# EAGLE board ebox (EAGLE 6.3)

Size 100 x 80 mm. Coordinates in mm from the lower left corner, seen from the top.
Outline: 0,0 100,0 100,80 0,80 0,0
Copper layers (1*16): Top 0.035mm / dielectric 1.5mm / Bottom 0.035mm
Design rules "default": minimum track width 10mil, minimum drill 24mil, track to track 8mil, track to pad 8mil, pad to pad 8mil, via to via 8mil, smd to smd 8mil, copper to edge 40mil, drill to drill 8mil, minimum pad ring 10mil, minimum via ring 8mil, stop-mask expansion 4mil, vias tented up to drill 0mil, thermal gap 10mil

## Footprints (pad centres in the part's own frame; a part is rotated, then mirrored left to right if it is on the bottom)
C0805 = smd 1.3 x 1.5: 1 -0.95,0; 2 0.95,0
PANASONIC_D = smd 3 x 1.4: + 2.4,0; - -2.4,0
SOT23 = smd 1 x 1.4: 1 -0.95,-1.1; 2 0.95,-1.1; 3 0,1.1
SOT-23 = smd 0.787 x 0.889: 1 0.025,-1.016; 2 -0.94,1.016; 3 0.991,1.016
SMA = smd 2 x 2: A 2,0; C -2,0
TSSOP16 = smd 0.305 x 0.991: 1 -2.275,-2.918; 2 -1.625,-2.918; 3 -0.975,-2.918; 4 -0.325,-2.918; 5 0.325,-2.918; 6 0.975,-2.918; 7 1.625,-2.918; 8 2.275,-2.918; 9 2.275,2.918; 10 1.625,2.918; 11 0.975,2.918; 12 0.325,2.918; 13 -0.325,2.918; 14 -0.975,2.918; 15 -1.625,2.918; 16 -2.275,2.918
MSOP12-MSE = smd 0.45 x 1: 1 -1.625,-2.05; 2 -0.975,-2.05; 3 -0.325,-2.05; 4 0.325,-2.05; 5 0.975,-2.05; 6 1.625,-2.05; 7 1.625,2.05; 8 0.975,2.05; 9 0.325,2.05; 10 -0.325,2.05; 11 -0.975,2.05; 12 -1.625,2.05 | smd 2.845 x 1.651: 13 0,0
TQFP100 = smd 1.5 x 0.35: 1 -8,6; 2 -8,5.5; 3 -8,5; 4 -8,4.5; 5 -8,4; 6 -8,3.5; 7 -8,3; 8 -8,2.5; 9 -8,2; 10 -8,1.5; 11 -8,1; 12 -8,0.5; 13 -8,0; 14 -8,-0.5; 15 -8,-1; 16 -8,-1.5; 17 -8,-2; 18 -8,-2.5; 19 -8,-3; 20 -8,-3.5; 21 -8,-4; 22 -8,-4.5; 23 -8,-5; 24 -8,-5.5; 25 -8,-6; 51 8,-6; 52 8,-5.5; 53 8,-5; 54 8,-4.5; 55 8,-4; 56 8,-3.5; 57 8,-3; 58 8,-2.5; 59 8,-2; 60 8,-1.5; 61 8,-1; 62 8,-0.5; 63 8,0; 64 8,0.5; 65 8,1; 66 8,1.5; 67 8,2; 68 8,2.5; 69 8,3; 70 8,3.5; 71 8,4; 72 8,4.5; 73 8,5; 74 8,5.5; 75 8,6 | smd 0.35 x 1.5: 26 -6,-8; 27 -5.5,-8; 28 -5,-8; 29 -4.5,-8; 30 -4,-8; 31 -3.5,-8; 32 -3,-8; 33 -2.5,-8; 34 -2,-8; 35 -1.5,-8; 36 -1,-8; 37 -0.5,-8; 38 0,-8; 39 0.5,-8; 40 1,-8; 41 1.5,-8; 42 2,-8; 43 2.5,-8; 44 3,-8; 45 3.5,-8; 46 4,-8; 47 4.5,-8; 48 5,-8; 49 5.5,-8; 50 6,-8; 76 6,8; 77 5.5,8; 78 5,8; 79 4.5,8; 80 4,8; 81 3.5,8; 82 3,8; 83 2.5,8; 84 2,8; 85 1.5,8; 86 1,8; 87 0.5,8; 88 0,8; 89 -0.5,8; 90 -1,8; 91 -1.5,8; 92 -2,8; 93 -2.5,8; 94 -3,8; 95 -3.5,8; 96 -4,8; 97 -4.5,8; 98 -5,8; 99 -5.5,8; 100 -6,8
SOIC20R = smd 0.6 x 2.2: 1 -5.715,-4.775; 2 -4.445,-4.775; 3 -3.175,-4.775; 4 -1.905,-4.775; 5 -0.635,-4.775; 6 0.635,-4.775; 7 1.905,-4.775; 8 3.175,-4.775; 9 4.445,-4.8; 10 5.715,-4.8; 11 5.715,4.8; 12 4.445,4.8; 13 3.175,4.8; 14 1.905,4.8; 15 0.635,4.8; 16 -0.635,4.8; 17 -1.905,4.8; 18 -3.175,4.8; 19 -4.445,4.8; 20 -5.715,4.8
SOT23-DBV = smd 0.55 x 1.2: 1 -0.95,-1.3; 2 0,-1.3; 3 0.95,-1.3; 4 0.95,1.3; 5 -0.95,1.3
MSOP8 = smd 0.45 x 1: 1 -0.975,-2.05; 2 -0.325,-2.05; 3 0.325,-2.05; 4 0.975,-2.05; 5 0.975,2.05; 6 0.325,2.05; 7 -0.325,2.05; 8 -0.975,2.05
SO14 = smd 0.66 x 2.032: 1 -3.81,-3.073; 2 -2.54,-3.073; 3 -1.27,-3.073; 4 0,-3.073; 5 1.27,-3.073; 6 2.54,-3.073; 7 3.81,-3.073; 8 3.81,3.073; 9 2.54,3.073; 10 1.27,3.073; 11 0,3.073; 12 -1.27,3.073; 13 -2.54,3.073; 14 -3.81,3.073
SO08 = smd 0.66 x 2.032: 1 -1.905,-3.073; 2 -0.635,-3.073; 3 0.635,-3.073; 4 1.905,-3.073; 5 1.905,3.073; 6 0.635,3.073; 7 -0.635,3.073; 8 -1.905,3.073
AVR-ISP-6 = drill 1.016 square: 1 -2.54,-1.27 | drill 1.016 octagon: 2 -2.54,1.27; 3 0,-1.27; 4 0,1.27; 5 2.54,-1.27; 6 2.54,1.27
IHLP-2020CZ-11 = smd 1.918 x 2.794: 1 -2.038,0; 2 2.038,0
L2012C = smd 1 x 1: 1 -1,0; 2 1,0
0402 = smd 0.7 x 0.9: 1 -0.65,0; 2 0.65,0
SRR1280 = smd 2.896 x 5.41: 1 -4.851,0; 2 4.851,0
CHIPLED_1206 = smd 1.5 x 1.5: A 0,-1.75; C 0,1.75
P-LCC-4 = smd 3.3 x 4.8: A -2,3.15; C@1 -2,-3.15; C@3 2,3.15; C@4 2,-3.15
R1206 = smd 1.6 x 1.803: 1 -1.422,0; 2 1.422,0
TO252 = smd 1 x 1.6: 1 -2.28,-4.8; 2 2.28,-4.8 | smd 5.4 x 6.2: 3 0,2.5
R0805 = smd 1.3 x 1.5: 1 -0.95,0; 2 0.95,0
R6332 = smd 1 x 3.2: 1 -3.1,0; 2 3.1,0
CT10-G1 = smd 2 x 1.3: 1 -7.62,0; 2 7.62,0
SOT223 = smd 1.219 x 2.235: 1 -2.311,-3.099; 2 0,-3.099; 3 2.311,-3.099 | smd 3.6 x 2.2: 4 0,3.099
RN41 = smd 0.8 x 1.6: 1 -6.6,-6.6; 2 -5.4,-6.6; 3 -4.2,-6.6; 4 -3,-6.6; 5 -1.8,-6.6; 6 -0.6,-6.6; 7 0.6,-6.6; 8 1.8,-6.6; 9 3,-6.6; 10 4.2,-6.6; 11 5.4,-6.6; 12 6.6,-6.6; 13 6.6,6.6; 14 5.4,6.6; 15 4.2,6.6; 16 3,6.6; 17 1.8,6.6; 18 0.6,6.6; 19 -0.6,6.6; 20 -1.8,6.6; 21 -3,6.6; 22 -4.2,6.6; 23 -5.4,6.6; 24 -6.6,6.6 | smd 1.6 x 0.8: 25 -9.4,4.8; 26 -9.4,3.2; 27 -9.4,1.6; 28 9.4,3.1; 29 9.4,-3.1; 30 9.4,-4.122; 31 9.4,-1.9; 32 9.4,-0.7; 33 9.4,0.7; 34 9.4,1.9; 35 9.4,4.122
EM406 = smd 0.6 x 1.55: 1 0,0; 2 1,0; 3 2,0; 4 3,0; 5 4,0; 6 5,0 | smd 1.2 x 1.8: P$1 -1.3,-2.225; P$2 6.3,-2.225
BULLET = drill 4.25 pad 6: P$1 0,0
17984-7PG-300 = drill 1.016: 1 -1.054,1.826; 2 -2.108,0; 3 -1.054,-1.826; 4 1.054,-1.826; 5 2.108,0; 6 1.054,1.826; 7 0,0
22-23-2031 = drill 1 long: 1 -2.54,0; 2 0,0; 3 2.54,0
DEANS = drill 4.445 pad 4.826 long: NEG 0.762,2.54; POS 0,-2.54
7381-2PG-300 = drill 1.321 pad 2.54: 1 2.6,0; 2 -2.6,0
B4B-ZR = drill 0.7 pad 1.1: 1 -2.25,0; 2 -0.75,0; 3 0.75,0; 4 2.25,0
22-23-2021 = drill 1 long: 1 -1.27,0; 2 1.27,0
7381-3PG-300 = drill 1.321 pad 2.54: 1 2,1.2; 2 -2,1.2; 3 0,-2.4

## Placement (x,y rotation side)
C2  0.1uF  [C0805]  -30.48,99.06 0 top  (outside the outline)
C3  0.1uF  [C0805]  -36.83,99.06 0 top  (outside the outline)
C4  0.1uF  [C0805]  -43.18,99.06 0 top  (outside the outline)
C5  0.1uF  [C0805]  -49.53,99.06 0 top  (outside the outline)
C6  0.1uF  [C0805]  -55.88,99.06 0 top  (outside the outline)
C7  1uF  [C0805]  27.94,58.42 90 top
C8  68uF  [PANASONIC_D]  27.94,31.75 270 top
C9  10uF  [C0805]  -35.56,111.76 0 top  (outside the outline)
C10  10uF  [C0805]  -41.91,111.76 0 top  (outside the outline)
C11  0.1uF  [C0805]  -62.23,99.06 0 top  (outside the outline)
C12  0.1uF  [C0805]  -68.58,99.06 0 top  (outside the outline)
C13  0.1uF  [C0805]  -74.93,99.06 0 top  (outside the outline)
C14  0.1uF  [C0805]  -81.28,99.06 0 top  (outside the outline)
C15  68uF  [PANASONIC_D]  29.21,22.86 0 top
C16  0.1uF  [C0805]  -87.63,99.06 0 top  (outside the outline)
C17  0.1uF  [C0805]  -93.98,99.06 0 top  (outside the outline)
C18  0.1uF  [C0805]  -100.33,99.06 0 top  (outside the outline)
C19  0.1uF  [C0805]  -106.68,99.06 0 top  (outside the outline)
C20  0.1uF  [C0805]  -113.03,99.06 0 top  (outside the outline)
C21  68uF  [PANASONIC_D]  -35.56,85.09 0 top  (outside the outline)
C22  220uF  [PANASONIC_D]  -44.45,85.09 0 top  (outside the outline)
C23  0.1uF  [C0805]  -119.38,99.06 0 top  (outside the outline)
C24  0.1uF  [C0805]  -17.78,105.41 0 top  (outside the outline)
C25  0.1uF  [C0805]  -24.13,105.41 0 top  (outside the outline)
C26  0.1uF  [C0805]  -30.48,105.41 0 top  (outside the outline)
C27  0.1uF  [C0805]  -36.83,105.41 0 top  (outside the outline)
C28  220uF  [PANASONIC_D]  -53.34,85.09 0 top  (outside the outline)
C29  68uF  [PANASONIC_D]  33.02,58.42 270 top
C30  0.1uF  [C0805]  -43.18,105.41 0 top  (outside the outline)
C31  0.1uF  [C0805]  -49.53,105.41 0 top  (outside the outline)
C32  0.1uF  [C0805]  -55.88,105.41 0 top  (outside the outline)
C33  0.1uF  [C0805]  -62.23,105.41 0 top  (outside the outline)
C34  0.1uF  [C0805]  -68.58,105.41 0 top  (outside the outline)
C37  0.1uF  [C0805]  -74.93,105.41 0 top  (outside the outline)
C41  10uF  [C0805]  24.13,62.23 180 top
C42  1uF  [C0805]  13.97,57.15 270 top
C43  0.1uF  [C0805]  -81.28,105.41 0 top  (outside the outline)
C44  0.1uF  [C0805]  -87.63,105.41 0 top  (outside the outline)
C45  10pF  [C0805]  -54.61,111.76 0 top  (outside the outline)
C46  10pF  [C0805]  -60.96,111.76 0 top  (outside the outline)
C47  10uF  [C0805]  -67.31,111.76 0 top  (outside the outline)
C48  10pF  [C0805]  17.78,44.45 0 top
D1  [SOT23]  -105.41,116.84 0 top  (outside the outline)
D2  GSOT05C  [SOT-23]  -74.93,83.82 0 top  (outside the outline)
D3  [SOT-23]  -109.22,83.82 0 top  (outside the outline)
D4  GSOT05C  [SOT-23]  -85.09,83.82 0 top  (outside the outline)
D5  MBRA340T3  [SMA]  -34.29,60.96 0 top  (outside the outline)
D6  GSOT05C  [SOT-23]  -95.25,83.82 0 top  (outside the outline)
D7  [SOT-23]  -113.03,83.82 0 top  (outside the outline)
D8  GSOT05C  [SOT-23]  -105.41,83.82 0 top  (outside the outline)
D9  MBRA340T3  [SMA]  25.4,52.07 0 top
D10  MBRA340T3  [SMA]  25.4,44.45 0 top
D11  MBRA340T3  [SMA]  -68.58,60.96 0 top  (outside the outline)
D12  MBRA340T3  [SMA]  36.83,64.77 90 top
IC1  MAX3221CUE  [TSSOP16]  38.1,24.13 90 top
IC2  LT3652  [MSOP12-MSE]  24.13,58.42 90 top
IC3  XMEGA128A1  [TQFP100]  49.53,10.16 0 top
IC4  LT1161  [SOIC20R]  49.53,25.4 0 top
IC5  SN74LVC1G125  [SOT23-DBV]  -96.52,60.96 0 top  (outside the outline)
IC6  SN74LVC1G125  [SOT23-DBV]  -111.76,60.96 0 top  (outside the outline)
IC7  MAX3221CUE  [TSSOP16]  83.82,24.13 90 top
IC8  INA170  [MSOP8]  7.62,50.8 0 top
IC9  SN74LVC1G125  [SOT23-DBV]  96.52,41.91 0 top
IC10  SN74LVC1G125  [SOT23-DBV]  77.47,39.37 0 top
IC11  MAX3221CUE  [TSSOP16]  59.69,24.13 90 top
IC12  INA170  [MSOP8]  3.81,50.8 0 top
IC13  SN74LVC1G125  [SOT23-DBV]  60.96,38.1 0 top
IC14  SN74LVC1G125  [SOT23-DBV]  44.45,38.1 0 top
IC15  MAX3221CUE  [TSSOP16]  26.67,38.1 90 top
IC17  SN74LVC1G125  [SOT23-DBV]  34.29,49.53 0 top
IC18  SN74LVC1G125  [SOT23-DBV]  -101.6,69.85 0 top  (outside the outline)
IC19  74ALS04D  [SO14]  72.39,22.86 270 top
IC20  AP1509-33  [SO08]  34.29,16.51 90 top
IC24  AP1509-5  [SO08]  -69.85,49.53 0 top  (outside the outline)
ISP1  AVR-PDIVERT  [AVR-ISP-6]  34.29,3.81 0 top
L1  5.6uH  [IHLP-2020CZ-11]  19.05,57.15 270 top
L2  10uH  [L2012C]  -78.74,111.76 0 top  (outside the outline)
L3  FERRITE  [0402]  -27.94,124.46 0 top  (outside the outline)
L5  47uH  [SRR1280]  7.62,40.64 0 top
L7  47uH  [SRR1280]  17.78,24.13 180 top
LED1  YEL  [CHIPLED_1206]  -121.92,83.82 0 top  (outside the outline)
LED2  RED  [CHIPLED_1206]  -16.51,91.44 0 top  (outside the outline)
LED3  GRN  [CHIPLED_1206]  -22.86,91.44 0 top  (outside the outline)
LED4  RED  [CHIPLED_1206]  -29.21,91.44 0 top  (outside the outline)
LED6  [P-LCC-4]  5.08,24.13 0 top
PTC1  50mA  [R1206]  -69.85,92.71 0 top  (outside the outline)
PTC2  50mA  [R1206]  -77.47,92.71 0 top  (outside the outline)
PTC3  50mA  [R1206]  -85.09,92.71 0 top  (outside the outline)
PTC4  50mA  [R1206]  -92.71,92.71 0 top  (outside the outline)
PTC5  50mA  [R1206]  -100.33,92.71 0 top  (outside the outline)
PTC6  50mA  [R1206]  -107.95,92.71 0 top  (outside the outline)
PTC7  50mA  [R1206]  -115.57,92.71 0 top  (outside the outline)
PTC8  50mA  [R1206]  -123.19,92.71 0 top  (outside the outline)
PTC9  1A  [R1206]  -16.51,99.06 0 top  (outside the outline)
PTC10  1A  [R1206]  -46.99,92.71 0 top  (outside the outline)
PTC11  1A  [R1206]  -54.61,92.71 0 top  (outside the outline)
PTC12  1A  [R1206]  -62.23,92.71 0 top  (outside the outline)
Q1  FDD4141TO252  [TO252]  19.05,36.83 0 top
R1  330  [R0805]  -66.04,118.11 0 top  (outside the outline)
R2  10k  [R0805]  -81.28,118.11 0 top  (outside the outline)
R3  330  [R0805]  -71.12,118.11 0 top  (outside the outline)
R4  1k  [R0805]  -101.6,118.11 0 top  (outside the outline)
R5  10k  [R0805]  -86.36,118.11 0 top  (outside the outline)
R6  100k  [R0805]  -100.33,105.41 0 top  (outside the outline)
R7  330  [R0805]  -76.2,118.11 0 top  (outside the outline)
R8  0.010  [R6332]  38.1,40.64 0 top
R9  0.010  [R6332]  88.9,40.64 180 top
R10  0.010  [R6332]  68.58,40.64 0 top
R11  0.010  [R6332]  53.34,40.64 0 top
R12  2K  [R0805]  -97.79,111.76 0 top  (outside the outline)
R13  2K  [R0805]  -104.14,111.76 0 top  (outside the outline)
R14  2K  [R0805]  -110.49,111.76 0 top  (outside the outline)
R15  2K  [R0805]  -116.84,111.76 0 top  (outside the outline)
R16  100k  [R0805]  -106.68,105.41 0 top  (outside the outline)
R17  100k  [R0805]  -113.03,105.41 0 top  (outside the outline)
R18  100k  [R0805]  -119.38,105.41 0 top  (outside the outline)
R19  100k  [R0805]  -16.51,111.76 0 top  (outside the outline)
R20  0.050  [R6332]  10.16,58.42 90 top
R21  0.010  [R6332]  5.08,58.42 270 top
R22  626k  [R0805]  17.78,63.5 90 top
R23  4.99k  [R0805]  -24.13,99.06 0 top  (outside the outline)
R24  412k  [R0805]  20.32,63.5 270 top
R25  1k  [R0805]  -123.19,111.76 0 top  (outside the outline)
R26  2k  [R0805]  -16.51,118.11 0 top  (outside the outline)
R27  10k  [R0805]  -22.86,118.11 0 top  (outside the outline)
R28  330  [R0805]  -29.21,118.11 0 top  (outside the outline)
R29  10k  [R0805]  19.05,48.26 0 top
R30  2k  [R0805]  27.94,48.26 0 top
R31  330  [R0805]  -48.26,118.11 0 top  (outside the outline)
R32  330  [R0805]  -54.61,118.11 0 top  (outside the outline)
R33  330  [R0805]  -60.96,118.11 0 top  (outside the outline)
S1  REED-SWITCH-CT10-1530-G1  [CT10-G1]  -87.63,77.47 0 top  (outside the outline)
S2  REED-SWITCH-CT10-1530-G1  [CT10-G1]  -116.84,77.47 0 top  (outside the outline)
T1  [SOT-23]  -116.84,83.82 0 top  (outside the outline)
T2  [SOT223]  38.1,34.29 180 top
T3  [SOT223]  88.9,34.29 180 top
T4  [SOT223]  68.58,34.29 180 top
T5  [SOT223]  53.34,34.29 180 top
U1  BLUETOOTH-RN42  [RN41]  16.51,8.89 0 top
U2  D2523T_  [EM406]  62.23,3.81 0 top
X1  BULLET  [BULLET]  81.28,76.2 0 top
X2  BULLET  [BULLET]  96.52,76.2 0 top
X3  17984-7PG-300  [17984-7PG-300]  46.99,49.53 0 bottom
X4  BULLET  [BULLET]  43.18,76.2 0 top
X5  17984-7PG-300  [17984-7PG-300]  90.17,49.53 0 bottom
X6  17984-7PG-300  [17984-7PG-300]  76.2,49.53 0 bottom
X7  17984-7PG-300  [17984-7PG-300]  60.96,49.53 0 bottom
X8  22-23-2031  [22-23-2031]  95.25,5.08 90 top
X9  22-23-2031  [22-23-2031]  87.63,5.08 90 top
X10  DEANS  [DEANS]  6.35,71.12 0 top
X11  DEANS  [DEANS]  29.21,71.12 0 top
X12  7381-2PG-300  [7381-2PG-300]  46.99,64.77 0 bottom
X13  B4B-ZR  [B4B-ZR]  16.51,72.39 270 top
X14  BULLET  [BULLET]  50.8,76.2 0 top
X17  22-23-2021  [22-23-2021]  80.01,6.35 90 top
X18  7381-3PG-300  [7381-3PG-300]  85.09,64.77 0 bottom
X19  7381-3PG-300  [7381-3PG-300]  66.04,64.77 0 bottom
X20  BULLET  [BULLET]  88.9,76.2 0 top
X21  BULLET  [BULLET]  58.42,76.2 0 top
X22  BULLET  [BULLET]  73.66,76.2 0 top
X23  BULLET  [BULLET]  66.04,76.2 0 top
X24  B4B-ZR  [B4B-ZR]  21.59,72.39 270 top

## Library data of the parts
C2-C34 C37 C41-C48 L2 PTC1-PTC12 R1-R33 = rcl
D1 D5 D9-D12 = diode
D2-D4 D6-D8 T2-T5 = zetex; OC_FARNELL: unknown; OC_NEWARK: unknown
IC1 IC7 IC11 IC15 = maxim; MF: MAXIM; MPN: MAX3221CUE+; OC_FARNELL: 1379915; OC_NEWARK: 68K4608
IC2 = crw; MPN: AD7992BRMZ-0; OC_FARNELL: 1078311; OC_NEWARK: 31M4422
IC3 = atmel; OC_FARNELL: unknown; OC_NEWARK: unknown
IC4-IC6 IC8-IC10 IC12-IC14 IC17 IC18 L1 L5 L7 X1-X7 X10-X12 X14 X18-X23 = crw
IC19 = 74xx-us
IC20 IC24 = crw; OC_FARNELL: unknown; OC_NEWARK: unknown
ISP1 = avr-7
L3 = inductors
LED1-LED4 LED6 = led
Q1 = transistor-fet
S1 S2 = switch-reed; MF: COTO TECHNOLOGY; MPN: CT10-1530-G1; OC_FARNELL: 1081696
T1 = zetex; MPN: DSS20200L-7; OC_FARNELL: unknown; OC_NEWARK: 25R4554
U1 U2 = SparkFun-RF
X8 X9 = con-molex; MF: MOLEX; MPN: 22-23-2031; OC_FARNELL: 1462950; OC_NEWARK: 30C0862
X13 X24 = con-jst; MF: FARNELL; MPN: B4B-ZR(LF)(SN); OC_FARNELL: 1830916; OC_NEWARK: 37K9960
X17 = con-molex; MF: MOLEX; MPN: 22-23-2021; OC_FARNELL: 1462926; OC_NEWARK: 25C3832

## Nets
!CHRG: IC2.4 IC3.68
!CHRG_FAULT: IC2.5 IC3.67
!EN232_1: IC1.1 IC3.69 IC19.1
!EN232_2: IC3.70 IC7.1 IC19.3
!EN232_3: IC3.71 IC11.1 IC19.5
!EN232_4: IC3.72 IC15.1 IC19.9
+3V3: C6.1 C14.1 C20.1 C22.+ C27.1 C34.1 C37.1 C43.1 C44.1 C47.1 IC1.15 IC6.5 IC7.15 IC8.3 IC8.8 IC10.5 IC11.15 IC12.3 IC12.8 IC14.5 IC15.15 IC18.5 IC19.14 IC20.3 ISP1.2 L2.2 L7.2 LED6.A R1.2 R2.2 R3.2 R7.2 R28.2 U1.11 U2.3
+5V: C28.+ IC24.3 L5.2 PTC9.1 PTC10.1 PTC11.1 PTC12.1
+12V: C8.+ C15.+ C21.+ IC4.11 IC4.20 IC20.1 IC24.1 Q1.3 R8.2 R9.2 R10.2 R11.2
AVR_AVCC: C10.1 C11.1 IC3.4 IC3.94 L3.1
AVR_VCC: C9.1 C12.1 IC3.14 IC3.24 IC3.34 IC3.44 IC3.54 IC3.64 IC3.74 IC3.83 L2.1 L3.2
BATT1: X13.2 X24.2
BATT2: X13.3 X24.3
BATT+: IC2.9 IC8.1 IC12.2 R20.2 R21.1 R22.2 R29.2 X10.POS X11.POS X13.4 X24.4
BATT-: X10.NEG X11.NEG X13.1 X24.1
BATT_CURR_IN: C45.1 IC3.95 IC8.6 R25.2
BATT_CURR_OUT: C46.1 IC3.96 IC12.6 R23.2
BATT_TEMP: IC2.8 IC3.97 X17.1
BATT_VSENSE: C48.1 IC3.98 R29.1 R30.2
BT_CTS: IC3.49 U1.16
BT_RESET: IC3.51 U1.5
BT_RTS: IC3.50 U1.15
BT_RXD: IC3.21 U1.14
BT_STATUS: IC3.52 U1.19
BT_TXD: IC3.22 U1.13
CHARGE: D12.A X4.P$1 X12.1
CHRG+: D9.A IC2.10 IC8.2 L1.2 R20.1
EN232_1: IC1.16 IC5.3 IC6.3 IC19.2
EN232_2: IC7.16 IC9.3 IC10.3 IC19.4
EN232_3: IC11.16 IC13.3 IC14.3 IC19.6
EN232_4: IC15.16 IC17.3 IC18.3 IC19.8
FAULT1: IC3.75 IC4.2 R12.2
FAULT2: IC3.77 IC4.4 R13.2
FAULT3: IC3.79 IC4.6 R14.2
FAULT4: IC3.81 IC4.8 R15.2
GND: C4.2 C5.1 C6.2 C7.2 C8.- C9.2 C10.2 C11.2 C12.2 C14.2 C15.- C18.2 C19.1 C20.2 C21.- C22.- C25.2 C26.1 C27.2 C28.- C29.- C32.2 C33.1 C34.2 C37.2 C41.2 C43.2 C44.2 C45.2 C46.2 C47.2 C48.2 D1.1 D2.1 D3.1 D4.1 D5.A D6.1 D7.1 D8.1 D10.A D11.A IC1.14 IC2.13 IC3.3 IC3.13 IC3.23 IC3.33 IC3.43 IC3.53 IC3.63 IC3.73 IC3.84 IC3.93 IC4.1 IC4.10 IC5.2 IC6.2 IC7.14 IC8.4 IC9.2 IC10.2 IC11.14 IC12.4 IC13.2 IC14.2 IC15.14 IC17.2 IC18.2 IC19.7 IC19.11 IC19.13 IC20.4 IC20.5 IC20.6 IC20.7 IC20.8 IC24.4 IC24.5 IC24.6 IC24.7 IC24.8 ISP1.6 LED4.C R23.1 R24.1 R25.1 R26.1 R27.1 R30.1 S1.2 S2.2 T1.1 U1.1 U1.12 U1.25 U1.27 U1.28 U1.29 U2.4 X3.7 X5.7 X6.7 X7.7 X8.3 X9.3 X12.2 X14.P$1 X17.2
GPIO1A: D2.2 IC3.5 IC3.25 PTC1.1
GPIO1B: D2.3 IC3.6 IC3.8 IC3.26 PTC2.1
GPIO2A: D4.2 IC3.7 IC3.29 PTC3.1
GPIO2B: D4.3 IC3.30 PTC4.1
GPIO3A: D6.2 IC3.9 IC3.35 PTC5.1
GPIO3B: D6.3 IC3.10 IC3.36 PTC6.1
GPIO4A: D8.2 IC3.11 IC3.39 PTC7.1
GPIO4B: D8.3 IC3.12 IC3.40 PTC8.1
GPS_RXD: IC3.17 U2.5
GPS_TXD: IC3.18 U2.6
LED_BLU: IC3.19 R32.1
LED_GRN: IC3.16 R33.1
LED_RED: IC3.15 R31.1
LED_STATUS: IC3.20 LED1.C
LED_STATUS1: LED2.C U1.21
MOT1_A: X1.P$1 X18.1
MOT1_B: X2.P$1 X18.2
MOT1_C: X18.3 X20.P$1
MOT1_SIG: IC3.45 X8.1
MOT2_A: X19.1 X21.P$1
MOT2_B: X19.2 X22.P$1
MOT2_C: X19.3 X23.P$1
MOT2_SIG: IC3.46 X9.1
N$1: C2.2 IC1.4
N$2: C2.1 IC1.2
N$3: C3.1 IC1.5
N$4: C3.2 IC1.6
N$5: IC3.90 ISP1.5 R2.1
N$6: LED1.A R3.1
N$7: IC3.89 ISP1.1
N$8: R5.2 T1.3
N$9: LED2.A R7.1
N$10: C4.1 IC1.3
N$11: C5.2 IC1.7
N$12: IC4.19 R8.1 T2.2
N$13: C13.2 Q1.1 R4.1 R6.2 S1.1 T1.2
N$14: IC4.17 R9.1 T3.2
N$15: IC4.15 R10.1 T4.2
N$16: IC4.13 R11.1 T5.2
N$17: IC4.18 T2.1
N$18: IC4.16 T3.1
N$19: IC4.14 T4.1
N$20: IC4.12 T5.1
N$21: C16.2 IC7.4
N$22: C16.1 IC7.2
N$23: C17.2 IC7.6
N$24: C17.1 IC7.5
N$25: C18.1 IC7.3
N$26: C19.2 IC7.7
N$27: C23.2 IC11.4
N$28: C23.1 IC11.2
N$29: C24.2 IC11.6
N$30: C24.1 IC11.5
N$31: C25.1 IC11.3
N$32: C26.2 IC11.7
N$33: C30.2 IC15.4
N$34: C30.1 IC15.2
N$35: C31.2 IC15.6
N$36: C31.1 IC15.5
N$37: C32.1 IC15.3
N$38: C33.2 IC15.7
N$39: C41.1 IC2.6
N$40: D5.C IC20.2 L7.1
N$41: C42.2 D9.C IC2.11
N$42: C42.1 D10.C IC2.12 L1.1
N$43: LED3.C U2.1
N$44: IC2.7 R22.1 R24.2
N$45: D11.C IC24.2 L5.1
N$46: LED4.A R1.1
N$47: C7.1 C29.+ D12.C IC2.1 IC2.2 IC2.3
N$48: IC8.5 R26.2
N$49: IC12.5 R27.2
N$50: LED3.A R28.1
N$51: LED6.C@3 R32.2
N$52: LED6.C@1 R31.2
N$53: LED6.C@4 R33.2
PWR_CTL: IC3.56 R5.1
PWR_CTL1: IC3.76 IC4.3 R12.1
PWR_CTL2: IC3.78 IC4.5 R13.1
PWR_CTL3: IC3.80 IC4.7 R14.1
PWR_CTL4: IC3.82 IC4.9 R15.1
PWR_SENSE: D1.3 IC3.57 R6.1
RX1_TTL: IC1.9 IC3.27 IC6.4
RX2_TTL: IC3.31 IC7.9 IC10.4
RX3_TTL: IC3.37 IC11.9 IC14.4
RX4_TTL: IC3.41 IC15.9 IC18.4
S1_5V: IC5.5 PTC9.2 X3.4
S1_12V: T2.3 X3.1
S1_GPIO_A: PTC1.2 X3.5
S1_GPIO_B: PTC2.2 X3.6
S1_RX: IC1.8 R16.2 X3.2
S1_RX_33V: D3.3 IC6.1 R16.1
S1_TX: IC1.13 IC5.4 X3.3
S2_5V: IC9.5 PTC10.2 X5.4
S2_12V: T3.3 X5.1
S2_GPIO_A: PTC3.2 X5.5
S2_GPIO_B: PTC4.2 X5.6
S2_RX: IC7.8 R17.2 X5.2
S2_RX_33V: D3.2 IC10.1 R17.1
S2_TX: IC7.13 IC9.4 X5.3
S3_5V: IC13.5 PTC11.2 X6.4
S3_12V: T4.3 X6.1
S3_GPIO_A: PTC5.2 X6.5
S3_GPIO_B: PTC6.2 X6.6
S3_RX: IC11.8 R18.2 X6.2
S3_RX_33V: D7.3 IC14.1 R18.1
S3_TX: IC11.13 IC13.4 X6.3
S4_5V: IC17.5 PTC12.2 X7.4
S4_12V: T5.3 X7.1
S4_GPIO_A: PTC7.2 X7.5
S4_GPIO_B: PTC8.2 X7.6
S4_RX: IC15.8 R19.2 X7.2
S4_RX_33V: D7.2 IC18.1 R19.1
S4_TX: IC15.13 IC17.4 X7.3
TX1_TTL: IC1.11 IC3.28 IC5.1
TX2_TTL: IC3.32 IC7.11 IC9.1
TX3_TTL: IC3.38 IC11.11 IC13.1
TX4_TTL: IC3.42 IC15.11 IC17.1
USER_BUTTON: IC3.55 S2.1
V+: C13.1 IC12.1 Q1.2 R4.2 R21.2

## Tracks (layer width: path | path; a pad name or v marks a point on that pad's centre or on a via)
!CHRG  (1 unrouted)
!CHRG_FAULT  (1 unrouted)
!EN232_1  (2 unrouted)
!EN232_2  (2 unrouted)
!EN232_3  (2 unrouted)
!EN232_4  (2 unrouted)
+3V3  (34 unrouted)
+5V  (6 unrouted)
+12V  (11 unrouted)
AVR_AVCC  (4 unrouted)
AVR_VCC  (11 unrouted)
BATT1  (1 unrouted)
BATT2  (1 unrouted)
BATT+  (10 unrouted)
BATT-  (3 unrouted)
BATT_CURR_IN  (3 unrouted)
BATT_CURR_OUT  (3 unrouted)
BATT_TEMP  (2 unrouted)
BATT_VSENSE  (3 unrouted)
BT_CTS  (1 unrouted)
BT_RESET  (1 unrouted)
BT_RTS  (1 unrouted)
BT_RXD  (1 unrouted)
BT_STATUS  (1 unrouted)
BT_TXD  (1 unrouted)
CHARGE  (2 unrouted)
CHRG+  (4 unrouted)
EN232_1  (3 unrouted)
EN232_2  (3 unrouted)
EN232_3  (3 unrouted)
EN232_4  (3 unrouted)
FAULT1  (2 unrouted)
FAULT2  (2 unrouted)
FAULT3  (2 unrouted)
FAULT4  (2 unrouted)
GND  (108 unrouted)
GPIO1A  (3 unrouted)
GPIO1B  (4 unrouted)
GPIO2A  (3 unrouted)
GPIO2B  (2 unrouted)
GPIO3A  (3 unrouted)
GPIO3B  (3 unrouted)
GPIO4A  (3 unrouted)
GPIO4B  (3 unrouted)
GPS_RXD  (1 unrouted)
GPS_TXD  (1 unrouted)
LED_BLU  (1 unrouted)
LED_GRN  (1 unrouted)
LED_RED  (1 unrouted)
LED_STATUS  (1 unrouted)
LED_STATUS1  (1 unrouted)
MOT1_A  (1 unrouted)
MOT1_B  (1 unrouted)
MOT1_C  (1 unrouted)
MOT1_SIG  (1 unrouted)
MOT2_A  (1 unrouted)
MOT2_B  (1 unrouted)
MOT2_C  (1 unrouted)
MOT2_SIG  (1 unrouted)
N$1  (1 unrouted)
N$2  (1 unrouted)
N$3  (1 unrouted)
N$4  (1 unrouted)
N$5  (2 unrouted)
N$6  (1 unrouted)
N$7  (1 unrouted)
N$8  (1 unrouted)
N$9  (1 unrouted)
N$10  (1 unrouted)
N$11  (1 unrouted)
N$12  (2 unrouted)
N$13  (5 unrouted)
N$14  (2 unrouted)
N$15  (2 unrouted)
N$16  (2 unrouted)
N$17  (1 unrouted)
N$18  (1 unrouted)
N$19  (1 unrouted)
N$20  (1 unrouted)
N$21  (1 unrouted)
N$22  (1 unrouted)
N$23  (1 unrouted)
N$24  (1 unrouted)
N$25  (1 unrouted)
N$26  (1 unrouted)
N$27  (1 unrouted)
N$28  (1 unrouted)
N$29  (1 unrouted)
N$30  (1 unrouted)
N$31  (1 unrouted)
N$32  (1 unrouted)
N$33  (1 unrouted)
N$34  (1 unrouted)
N$35  (1 unrouted)
N$36  (1 unrouted)
N$37  (1 unrouted)
N$38  (1 unrouted)
N$39  (1 unrouted)
N$40  (2 unrouted)
N$41  (2 unrouted)
N$42  (3 unrouted)
N$43  (1 unrouted)
N$44  (2 unrouted)
N$45  (2 unrouted)
N$46  (1 unrouted)
N$47  (5 unrouted)
N$48  (1 unrouted)
N$49  (1 unrouted)
N$50  (1 unrouted)
N$51  (1 unrouted)
N$52  (1 unrouted)
N$53  (1 unrouted)
PWR_CTL  (1 unrouted)
PWR_CTL1  (2 unrouted)
PWR_CTL2  (2 unrouted)
PWR_CTL3  (2 unrouted)
PWR_CTL4  (2 unrouted)
PWR_SENSE  (2 unrouted)
RX1_TTL  (2 unrouted)
RX2_TTL  (2 unrouted)
RX3_TTL  (2 unrouted)
RX4_TTL  (2 unrouted)
S1_5V  (2 unrouted)
S1_12V  (1 unrouted)
S1_GPIO_A  (1 unrouted)
S1_GPIO_B  (1 unrouted)
S1_RX  (2 unrouted)
S1_RX_33V  (2 unrouted)
S1_TX  (2 unrouted)
S2_5V  (2 unrouted)
S2_12V  (1 unrouted)
S2_GPIO_A  (1 unrouted)
S2_GPIO_B  (1 unrouted)
S2_RX  (2 unrouted)
S2_RX_33V  (2 unrouted)
S2_TX  (2 unrouted)
S3_5V  (2 unrouted)
S3_12V  (1 unrouted)
S3_GPIO_A  (1 unrouted)
S3_GPIO_B  (1 unrouted)
S3_RX  (2 unrouted)
S3_RX_33V  (2 unrouted)
S3_TX  (2 unrouted)
S4_5V  (2 unrouted)
S4_12V  (1 unrouted)
S4_GPIO_A  (1 unrouted)
S4_GPIO_B  (1 unrouted)
S4_RX  (2 unrouted)
S4_RX_33V  (2 unrouted)
S4_TX  (2 unrouted)
TX1_TTL  (2 unrouted)
TX2_TTL  (2 unrouted)
TX3_TTL  (2 unrouted)
TX4_TTL  (2 unrouted)
USER_BUTTON  (1 unrouted)
V+  (4 unrouted)